# Altium PCB Breakout_ER-TFT1.28-2.PcbDoc
Units mm, origin at the board's own origin, x right, y up, seen from the top; angles counter-clockwise.
Board outline 13.97 x 32.38 mm, 2 copper layers (Top Layer, Bottom Layer); 5 components, 24 nets, 48 pads, 0 vias.
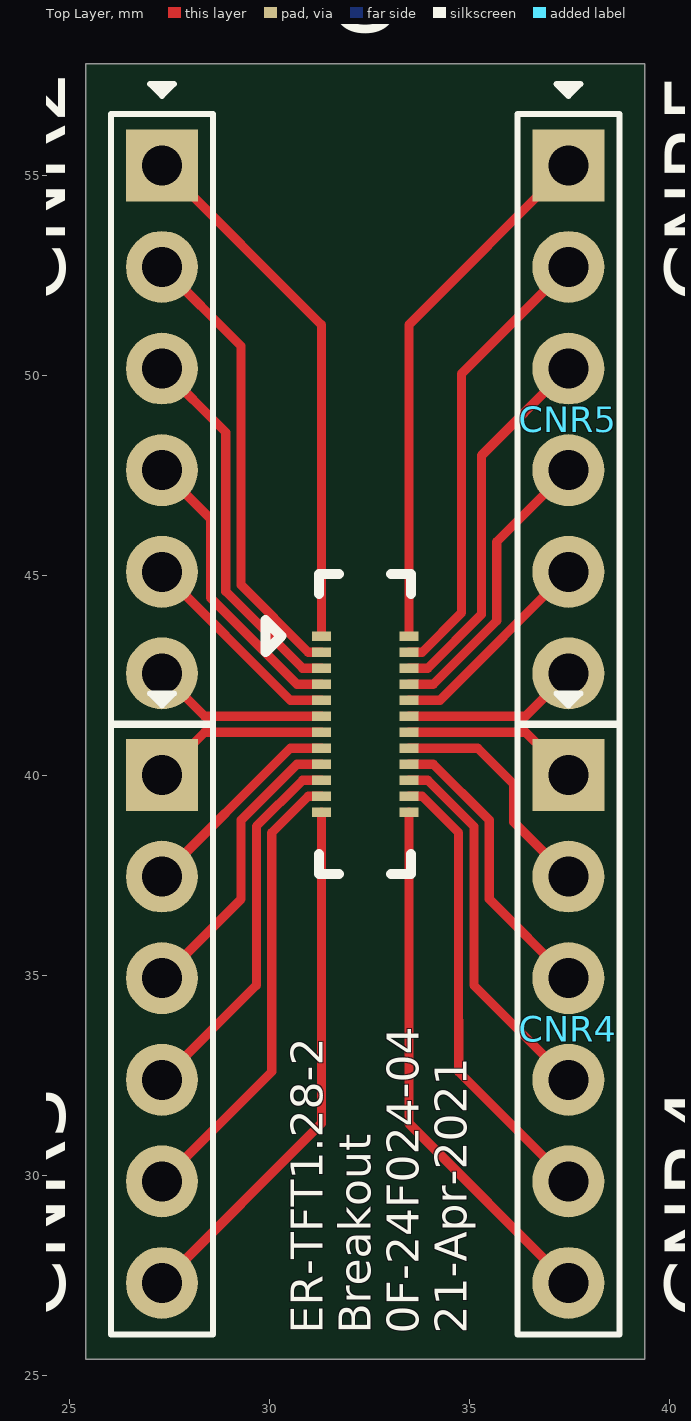
[diagram p0: Top Layer view]
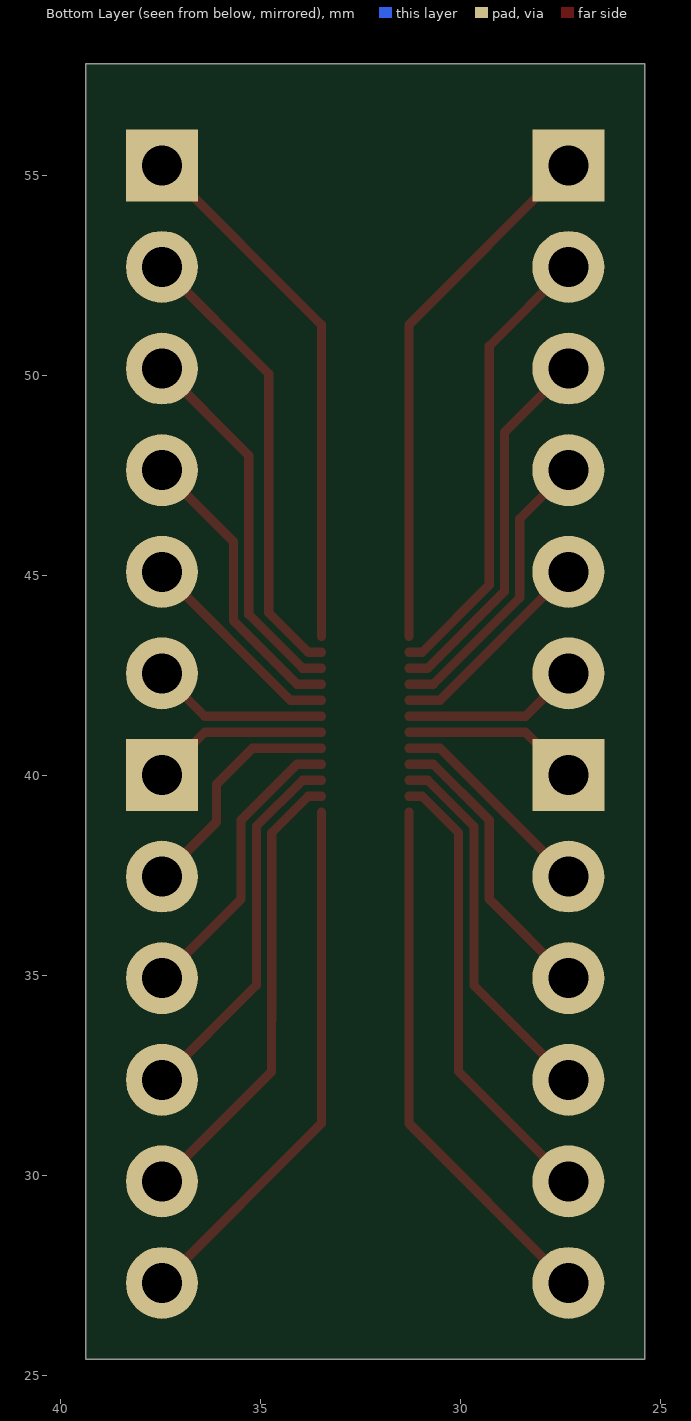
[diagram p1: Bottom Layer view, seen from below]
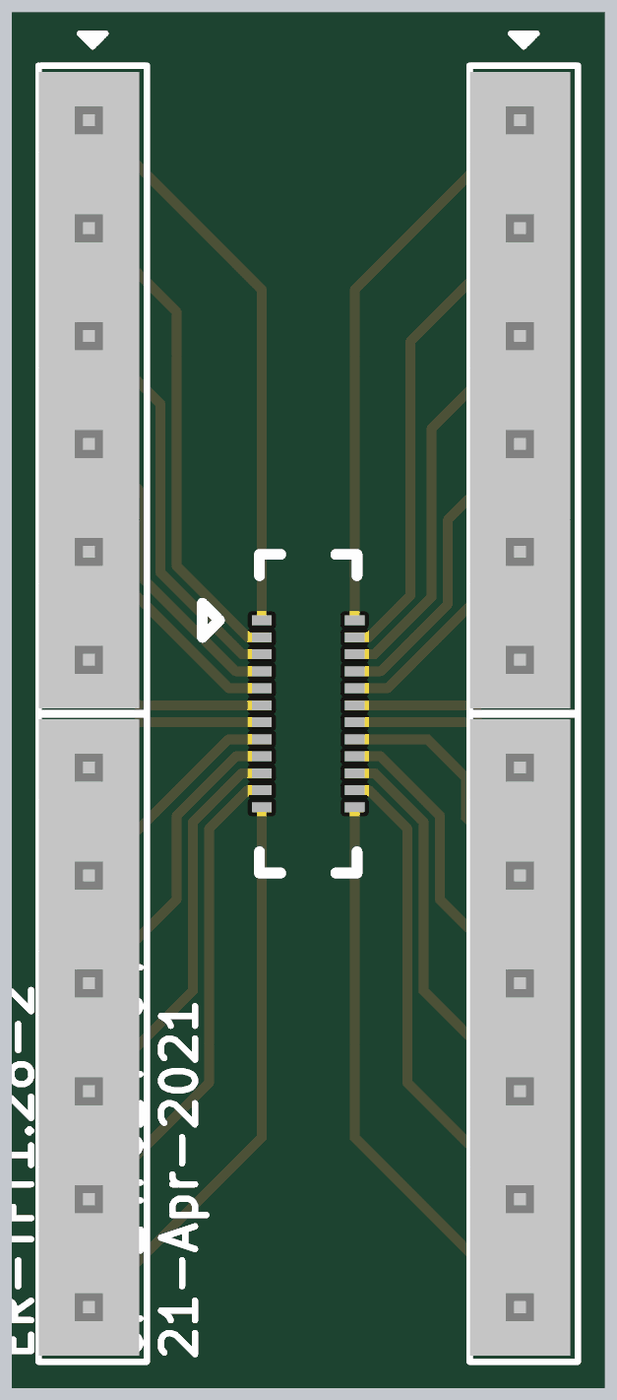
[diagram p2: 3D render of the assembled board from above, using the file's embedded part models]

## Layer stack, top to bottom
Top Solder: solder mask 0.0102, Solder Resist, Dk 3.5
Top Layer: signal copper 0.0356
Dielectric 1: dielectric 0.32, FR-4, Dk 4.8
Bottom Layer: signal copper 0.0356
Bottom Solder: solder mask 0.0102, Solder Resist, Dk 3.5

## Board outline
25.4,25.4 39.37,25.4 39.37,57.785 25.4,57.785

## Design rules (kind name [scope] priority, off if disabled: settings)
Clearance [All] p1: gap=0.152 ignorepadtopadclearanceinfootprint=FALSE
ComponentClearance [All] p1: gap=0 collisioncheckmode=3 verticalgap=0.254 showdistances=FALSE
PolygonConnect [All] p1: connectstyle=Relief reliefconductorwidth=0.254 reliefentries=4 polygonreliefangle="90 Angle" airgapwidth=0.254
RoutingVias [All] p1: holewidth=0.711 width=1.27 viastyle="Through Hole" minholewidth=0.711 minwidth=1.27 maxholewidth=0.711 maxwidth=1.27
SolderMaskExpansion [All] p1: expansion=0.102 istentingtop=FALSE
Width [All] p1: maxlimit=1 minlimit=0.1 preferedwidth=0.23
29 further rules are at their usual default settings.

## Components (designator, comment, footprint, x,y, rotation, side; value= is the part's Value field where it differs from the comment)
CNR1 "0K-24F024-04" 0K-24F024-04 32.385,41.275 r90 top
CNR2 "- CNR-IDC:6x1" SIP06-2.54P 27.305,48.895 r270 top
CNR3 "" SIP06-2.54P 27.305,33.655 r270 top
CNR4 "" SIP06-2.54P 37.465,33.655 r270 top
CNR5 "" SIP06-2.54P 37.465,48.895 r270 top

## Footprints (in the part's own frame and the unit in brackets; to place one, negate y for a bottom-side part, rotate by r counter-clockwise, add the part's x,y. Pads: shape width x height; smd on the part's side, far side on the other; paste and mask are expansions set on the pad)
0K-24F024-04 [mm] "24 Pins 0.4mm Pitch ZIF Connector"
  rect 0.23x0.47 smd: 1(2.2,1.095) 2(1.8,1.095) 3(1.4,1.095) 4(1,1.095) 5(0.6,1.095) 6(0.2,1.095) 7(-0.2,1.095) 8(-0.6,1.095) 9(-1,1.095) 10(-1.4,1.095) 11(-1.8,1.095) 12(-2.2,1.095) 13(-2.2,-1.095) 14(-1.8,-1.095) 15(-1.4,-1.095) 16(-1,-1.095) 17(-0.6,-1.095) 18(-0.2,-1.095) 19(0.2,-1.095) 20(0.6,-1.095) 21(1,-1.095) 22(1.4,-1.095) 23(1.8,-1.095) 24(2.2,-1.095)
  silkscreen extent -3.75,-1.15 3.75,2.5, body extent -3.75,-1.15 3.75,1.15, height 0.8
SIP06-2.54P [mm] "Single In-line Package; Pin Type; 6 Leads; Pitch: 2.54mm; Normally Used As Jumper Header"
  rect 1.8x1.8 hole 1: 1(-6.35,0)
  round 1.8 hole 1: 2(-3.81,0) 3(-1.27,0) 4(1.27,0) 5(3.81,0) 6(6.35,0)
  silkscreen extent -8.39,-1.28 7.63,1.28, body extent -7.49,-1.27 7.49,1.09, height 10.84

## Part data
CNR1: library part >CNR:IDC-2x12, "24 Pins 0.4mm Pitch ZIF Connector"
CNR3 CNR4 CNR5: library part "- CNR-IDC:6x1", Cmmt=-
CNR2: Cmmt=-

## Nets (pads, with @x,y where several pads share a name; then routed paths per layer and width w, separated by ;. In a path a pad name is that pad's centre, name@x,y a point inside that pad or via, vN(x,y) a via of type N, cw(c..) or ccw(c..) an arc to the next point about the centre after c; other vN are vias at no path point)
NetCNR1_1: CNR1.1 CNR2.1 | length 13.4
  Top Layer w0.23: CNR2.1 31.29,51.26 CNR1.1
NetCNR1_2: CNR1.2 CNR2.2 | length 11.5
  Top Layer w0.23: CNR2.2 29.284,50.726 29.284,44.753 30.962,43.075 CNR1.2
NetCNR1_3: CNR1.3 CNR2.3 | length 9.4
  Top Layer w0.23: CNR2.3 28.901,48.569 28.901,44.595 30.821,42.675 CNR1.3
NetCNR1_4: CNR1.4 CNR2.4 | length 7.4
  Top Layer w0.23: CNR2.4 28.519,46.411 28.519,44.436 30.68,42.275 CNR1.4
NetCNR1_5: CNR1.5 CNR2.5 | length 5.3
  Top Layer w0.23: CNR2.5 30.515,41.875 CNR1.5
NetCNR1_6: CNR1.6 CNR2.6 | length 4.4
  Top Layer w0.23: CNR2.6 28.375,41.475 CNR1.6
NetCNR1_7: CNR1.7 CNR3.1 | length 4.4
  Top Layer w0.23: CNR3.1 28.375,41.075 CNR1.7
NetCNR1_8: CNR1.8 CNR3.2 | length 5.3
  Top Layer w0.23: CNR3.2 30.515,40.675 CNR1.8
NetCNR1_9: CNR1.9 CNR3.3 | length 7.4
  Top Layer w0.23: CNR3.3 29.284,36.904 29.284,38.878 30.68,40.275 CNR1.9
NetCNR1_10: CNR1.10 CNR3.4 | length 9.4
  Top Layer w0.23: CNR3.4 29.666,34.746 29.666,38.72 30.821,39.875 CNR1.10
NetCNR1_11: CNR1.11 CNR3.5 | length 11.5
  Top Layer w0.23: CNR3.5 30.048,32.588 30.048,38.562 30.962,39.475 CNR1.11
NetCNR1_12: CNR1.12 CNR3.6 | length 13.4
  Top Layer w0.23: CNR3.6 31.29,31.29 CNR1.12
NetCNR1_13: CNR1.13 CNR4.6 | length 13.4
  Top Layer w0.23: CNR1.13 33.48,31.29 CNR4.6
NetCNR1_14: CNR1.14 CNR4.5 | length 11.5
  Top Layer w0.23: CNR1.14 33.808,39.475 34.722,38.562 34.722,33.878 34.725,33.875 34.725,32.585 CNR4.5
NetCNR1_15: CNR1.15 CNR4.4 | length 9.4
  Top Layer w0.23: CNR1.15 33.949,39.875 35.104,38.72 35.104,34.746 CNR4.4
NetCNR1_16: CNR1.16 CNR4.3 | length 7.4
  Top Layer w0.23: CNR1.16 34.09,40.275 35.486,38.878 35.486,36.904 CNR4.3
NetCNR1_17: CNR1.17 CNR4.2 | length 5.9
  Top Layer w0.23: CNR1.17 35.2,40.675 36.1,39.775 36.1,38.83 CNR4.2
NetCNR1_18: CNR1.18 CNR4.1 | length 4.4
  Top Layer w0.23: CNR1.18 36.395,41.075 CNR4.1
NetCNR1_19: CNR1.19 CNR5.6 | length 4.4
  Top Layer w0.23: CNR1.19 36.395,41.475 CNR5.6
NetCNR1_20: CNR1.20 CNR5.5 | length 5.3
  Top Layer w0.23: CNR1.20 34.255,41.875 CNR5.5
NetCNR1_21: CNR1.21 CNR5.4 | length 7.4
  Top Layer w0.23: CNR1.21 34.09,42.275 35.675,43.86 35.675,45.835 CNR5.4
NetCNR1_22: CNR1.22 CNR5.3 | length 9.4
  Top Layer w0.23: CNR1.22 33.949,42.675 35.293,44.019 35.293,47.993 CNR5.3
NetCNR1_23: CNR1.23 CNR5.2 | length 11.5
  Top Layer w0.23: CNR1.23 33.808,43.075 34.793,44.059 34.793,50.033 CNR5.2
NetCNR1_24: CNR1.24 CNR5.1 | length 13.4
  Top Layer w0.23: CNR1.24 33.48,51.26 CNR5.1

## Silkscreen, mask and mechanical layers (free items; w line width, h text height)
Top Overlay:
  text "ER-TFT1.28-2 / Breakout / 0F-24F024-04 / 21-Apr-2021" at 34.925,26.035 h0.8 r90
Mechanical 1:
  the board outline again, w0.254